# Altium PCB driverV1.2.PcbDoc (part 2 of 2)
Units mil, origin at the board's own origin, x right, y up, seen from the top; angles counter-clockwise.
Board outline 6000 x 4000 mil, 2 copper layers (Top Layer, Bottom Layer); 172 components, 108 nets, 481 pads, 590 vias.
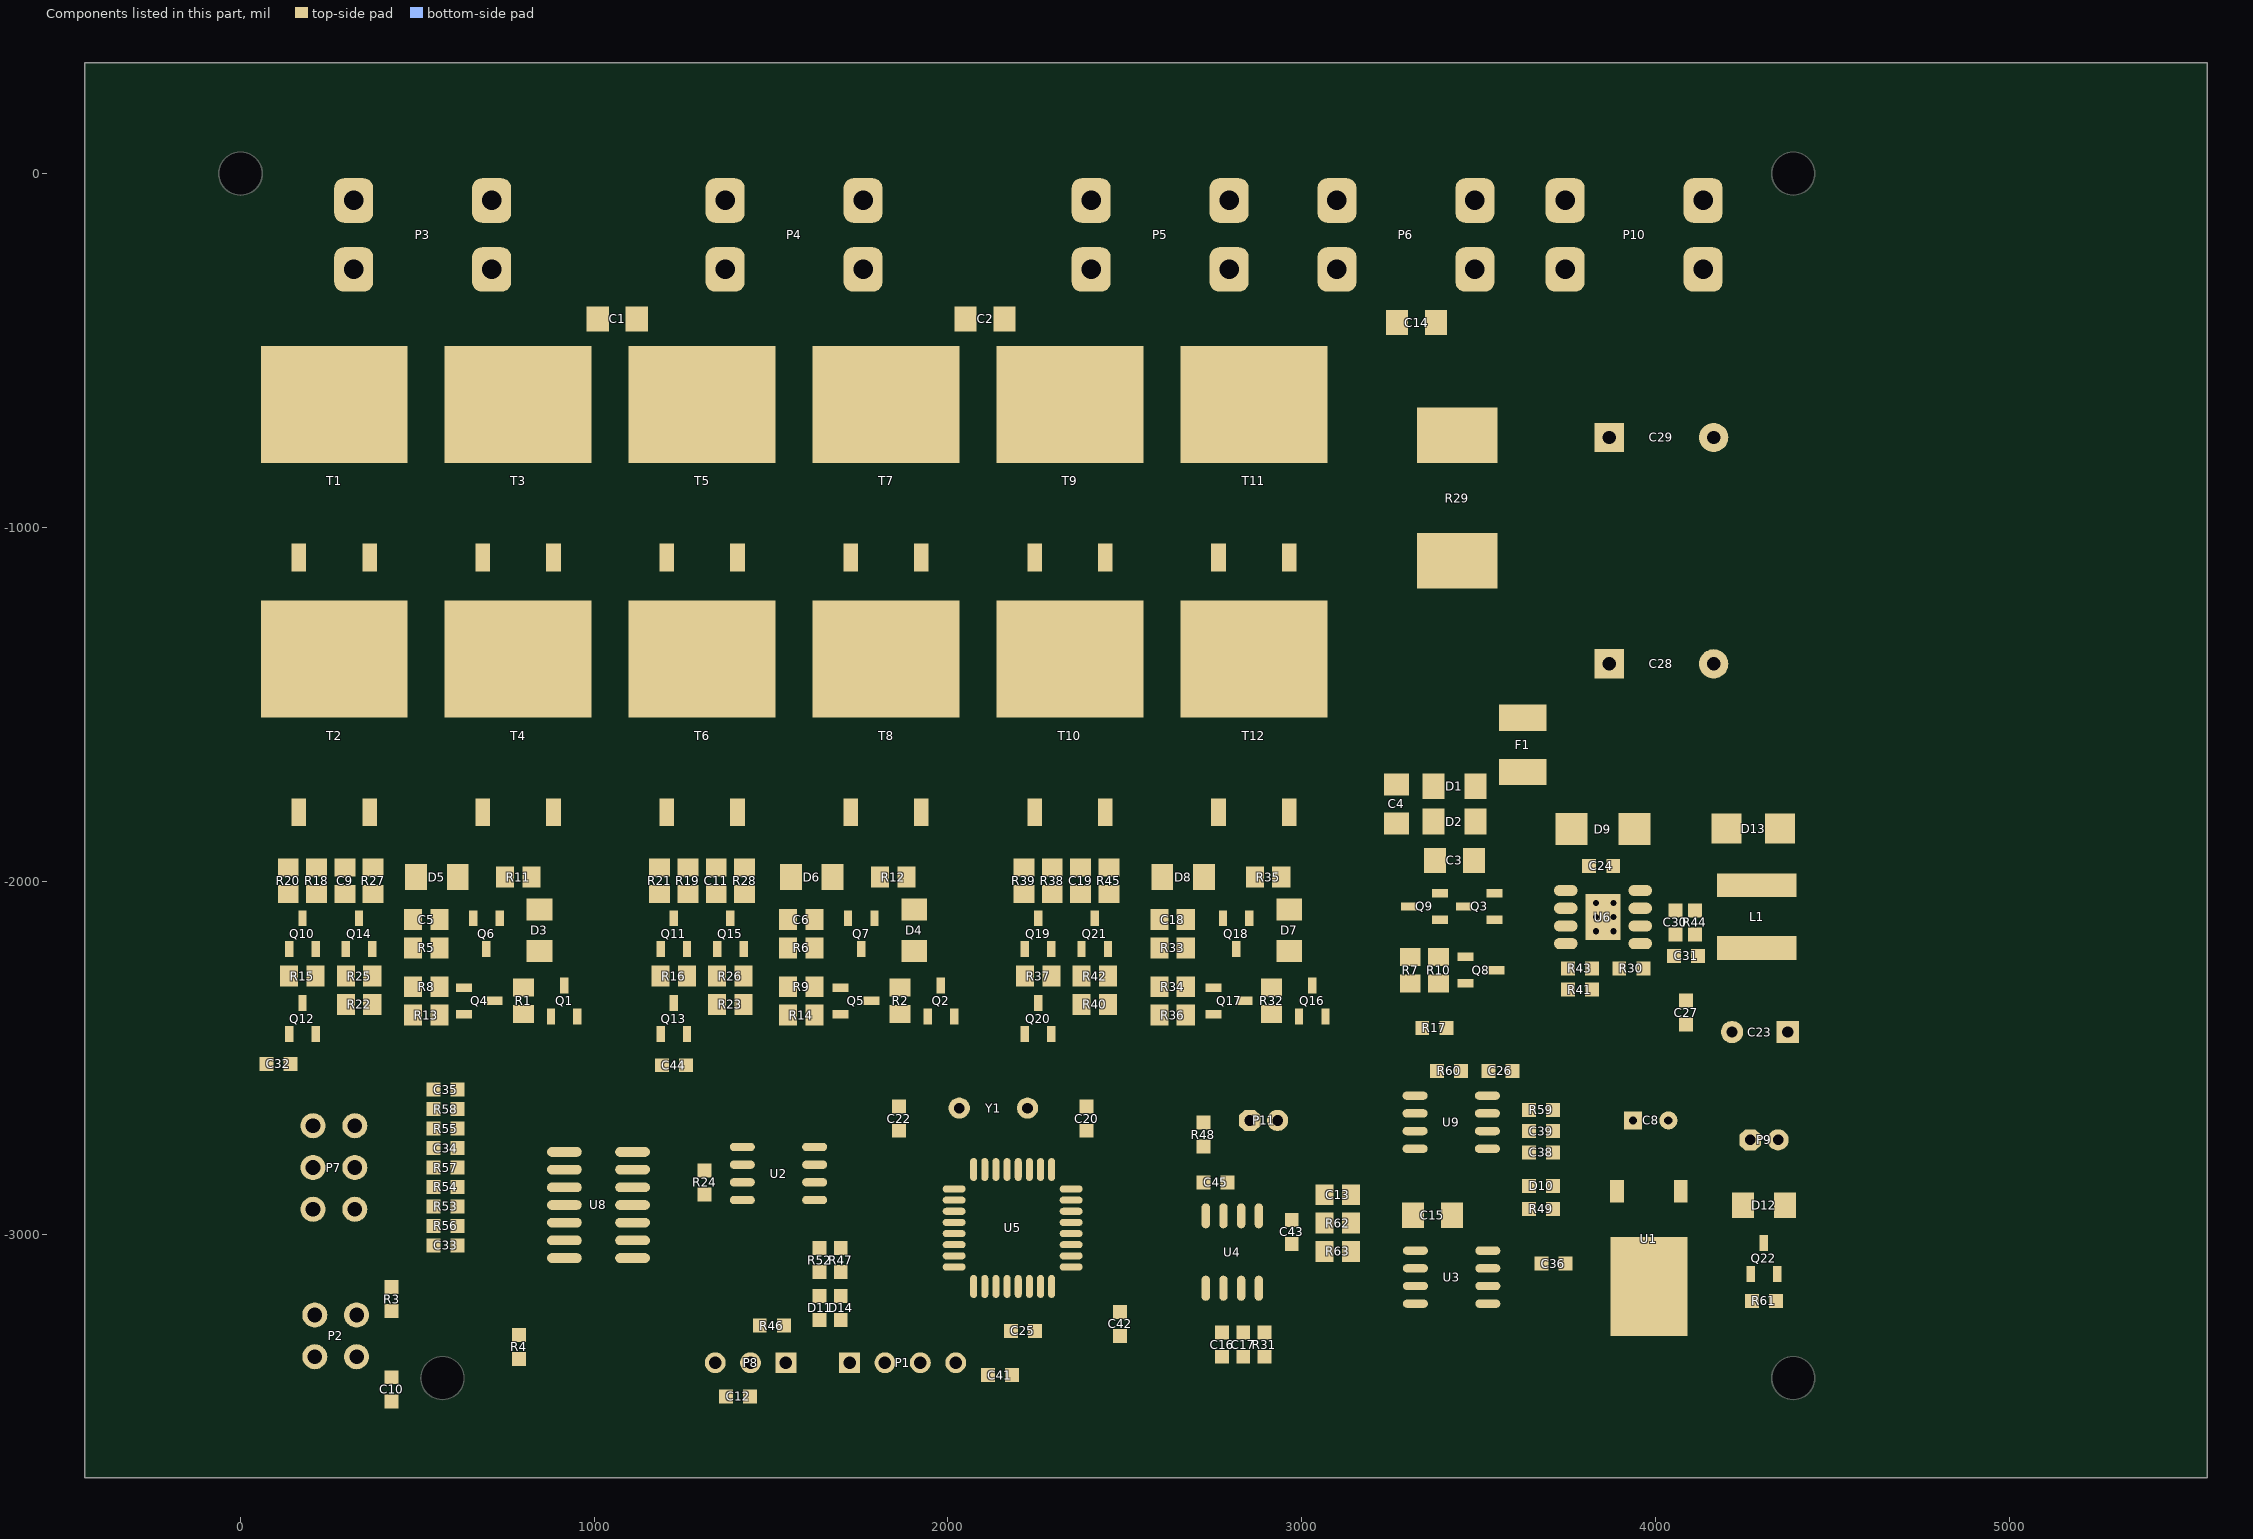
[diagram p2: the components of this part, seen from the top]

## Silkscreen, mask and mechanical layers (free items; w line width, h text height) (continued)
Mechanical 15:
  circle w5.91: c229,-471.96 r62.99
  lines w6: -62.34,-471.96 229,-471.96 229,-407
  lines w9.84: -63,-2375.5 3267.71,-2375.5 3267.71,-407 -63,-407 -63,-2375.5